# Altium PCB PATHOS_DriveBoard.PcbDoc (part 2 of 2)
Units mm, origin at the board's own origin, x right, y up, seen from the top; angles counter-clockwise.
Board outline 131 x 135 mm, 2 copper layers (Top Layer, Bottom Layer), stack 1.57 mm thick; 68 components, 99 nets, 394 pads, 251 vias.
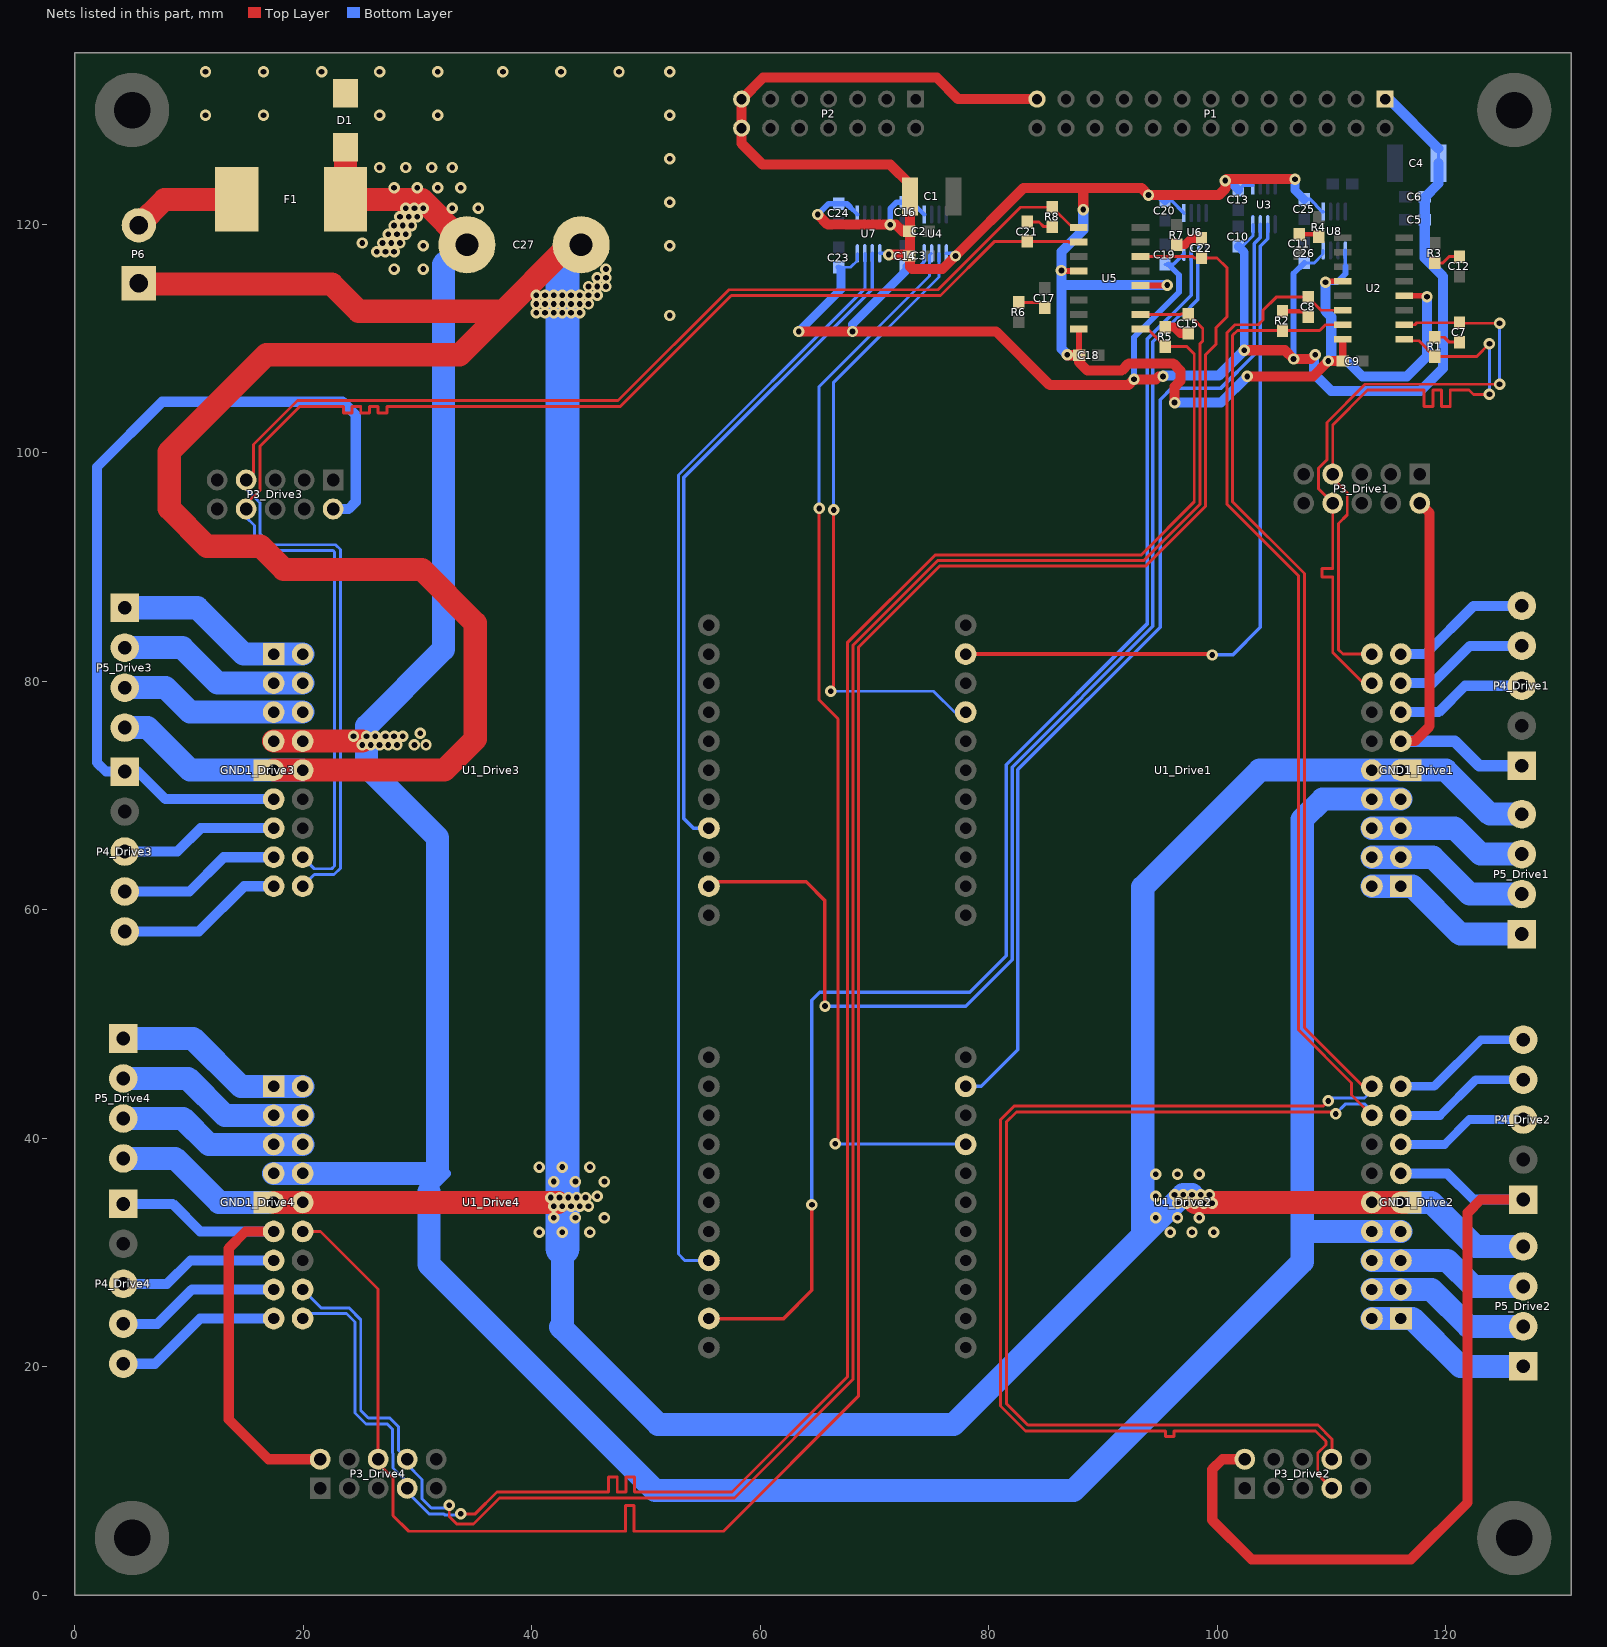
[diagram p2: the nets of this part, all layers, seen from the top]

## Via types
v1: diameter 1, hole 0.5, Top Layer to Bottom Layer, 249 vias
v2: diameter 1.27, hole 0.5, Top Layer to Bottom Layer, 2 vias

## Nets (pads, with @x,y where several pads share a name; then routed paths per layer and width w, separated by ;. In a path a pad name is that pad's centre, name@x,y a point inside that pad or via, vN(x,y) a via of type N, cw(c..) or ccw(c..) an arc to the next point about the centre after c; other vN are vias at no path point) (continued)
ENC_A_DIFF_P4: C22.2 P3_Drive4.6 U1_Drive4.12 U5.6 | length 210.5
  Top Layer w0.254: U1_Drive4.12@19.939,31.83 21.51,31.83 26.543,26.797 P3_Drive4.6@26.543,11.891 26.543,11.557 27.853,10.247 27.853,6.949 29.214,5.588 41.199,5.588 48.184,5.588 48.184,7.853 48.946,7.853 48.946,5.588 49.708,5.588 50.089,5.588 56.769,5.588 68.58,17.399 68.58,82.963 75.711,90.094 93.745,90.094 98.955,95.304 98.955,108.564 99.873,109.481 99.873,110.922 100.838,111.887 100.838,116.205 99.982,117.062 C22.2@98.618,117.062 97.991,117.062 97.879,117.174 U5.6@93.284,117.174
ENC_B_DIFF_N1: P3_Drive1.7 R1.1 U1_Drive1.18 U2.1 | length 57.6
  Top Layer w0.254: U1_Drive1.18@113.538,82.376 110.998,82.376 110.617,82.757 110.617,93.806 111.379,94.568 111.379,96.473 110.109,97.743 P3_Drive1.7@110.109,98.124 110.109,102.442 113.157,105.49 115.697,105.49 118.11,105.49 118.11,104.041 118.872,104.041 118.872,105.49 119.634,105.49 119.634,104.041 120.396,104.041 120.396,105.49 120.777,105.49 122.047,105.49 122.428,105.109 v1(123.825,105.109) ; U2.1@116.379,109.935 116.506,109.808 117.649,109.808 R1.1@119.046,108.411 122.682,108.411 v1(123.825,109.554)
  Bottom Layer w0.254: v1(123.825,105.109) 123.825,109.3 123.952,109.427 v1(123.825,109.554)
ENC_B_DIFF_N2: P3_Drive2.7 R2.1 U1_Drive2.18 U2.15 | length 176.5
  Top Layer w0.254: v1(109.728,43.26) 109.267,42.799 82.213,42.799 81.026,41.612 81.026,16.554 83.207,14.373 86.766,14.373 95.453,14.373 95.453,13.865 96.215,13.865 96.215,14.373 96.596,14.373 108.607,14.373 109.521,13.459 109.521,13.148 108.799,12.426 108.799,10.581 P3_Drive2.7@110.029,9.351 ; U2.15@110.979,111.205 109.474,111.205 108.966,110.697 R2.1@105.711,110.697 101.763,110.697 101.346,110.28 101.346,95.714 107.637,89.423 107.637,49.669 112.776,44.53 U1_Drive2.18@113.538,44.53 U1_Drive2.18@113.919,44.53
  Bottom Layer w0.254: v1(109.728,43.26) 109.982,43.514 112.903,43.514 U1_Drive2.18@113.919,44.53
ENC_B_DIFF_N3: P3_Drive3.7 R8.1 U1_Drive3.18 U5.9 | length 129.7
  Top Layer w0.254: P3_Drive3.7@14.986,97.616 15.621,98.251 15.621,100.711 19.482,104.572 47.549,104.572 57.25,114.273 75.565,114.273 82.784,121.492 R8.1@85.537,121.492 87.188,119.841 87.757,119.841 U5.9@87.884,119.714
  Bottom Layer w0.254: P3_Drive3.7@14.986,97.616 14.986,96.841 16.216,95.611 16.216,92.877 17.145,91.948 22.816,91.948 23.241,91.523 23.241,63.624 22.689,63.072 20.955,63.072 U1_Drive3.18@19.939,62.056
ENC_B_DIFF_N4: P3_Drive4.7 R5.1 U1_Drive4.18 U5.1 | length 191.1
  Top Layer w0.254: v1(33.782,7.112) 35.052,7.112 36.957,9.017 44.755,9.017 46.711,9.017 46.711,10.333 47.473,10.333 47.473,9.017 48.235,9.017 48.235,10.333 48.997,10.333 48.997,9.017 49.759,9.017 50.14,9.017 57.531,9.017 67.615,19.101 67.615,83.363 75.311,91.059 93.345,91.059 97.99,95.704 97.99,108.639 97.329,109.3 R5.1@95.443,109.3 94.046,110.697 93.411,110.697 U5.1@93.284,110.824
  Bottom Layer w0.254: U1_Drive4.18@20.146,24.21 U1_Drive4.18@19.939,24.21 20.367,24.638 23.771,24.638 24.511,23.898 24.511,15.948 25.473,14.986 27.349,14.986 27.813,14.522 27.813,12.443 27.853,12.403 27.853,11.136 29.083,9.906 P3_Drive4.7@29.083,9.351 29.083,9.017 30.988,7.112 32.282,7.112 32.401,6.993 33.647,6.993 33.766,7.112 v1(33.782,7.112)
ENC_B_DIFF_P1: C7.2 P3_Drive1.8 U1_Drive1.16 U2.2 | length 57.6
  Top Layer w0.254: U1_Drive1.16@113.538,79.836 112.776,79.836 110.109,82.503 110.109,88.091 110.109,89.107 109.167,89.107 109.167,89.869 110.109,89.869 110.109,90.631 110.109,91.012 P3_Drive1.8@110.109,95.584 108.879,96.814 108.879,98.659 109.599,99.379 109.601,99.379 109.601,102.652 112.947,105.998 v1(124.714,105.998) ; U2.2@116.379,111.205 117.281,111.205 117.457,111.381 C7.2@121.205,111.381 121.254,111.332 v1(124.714,111.332)
  Bottom Layer w0.254: v1(124.714,105.998) v1(124.714,111.332)
ENC_B_DIFF_P2: C8.1 P3_Drive2.8 U1_Drive2.16 U2.14 | length 176.4
  Top Layer w0.254: P3_Drive2.8@110.363,12.225 P3_Drive2.8@110.029,11.891 110.029,13.669 108.817,14.881 83.417,14.881 81.534,16.764 81.534,41.402 82.423,42.291 110.189,42.291 v1(110.363,42.117) ; U2.14@110.979,112.475 109.093,112.475 C8.1@107.95,113.618 105.156,113.618 104.013,112.475 104.013,111.633 103.585,111.205 101.553,111.205 100.838,110.49 100.838,95.504 107.129,89.213 107.129,49.458 111.76,44.828 111.76,43.768 U1_Drive2.16@113.538,41.99
  Bottom Layer w0.254: v1(110.363,42.117) 111.252,43.006 112.903,43.006 U1_Drive2.16@113.919,41.99
ENC_B_DIFF_P3: C21.1 P3_Drive3.8 U1_Drive3.16 U5.10 | length 129.7
  Top Layer w0.254: P3_Drive3.8@14.986,95.076 14.986,95.504 16.216,96.734 16.216,100.588 19.692,104.064 22.352,104.064 22.733,104.064 23.495,104.064 23.495,103.494 24.257,103.494 24.257,104.064 25.019,104.064 25.019,103.494 25.781,103.494 25.781,104.064 26.543,104.064 26.543,103.494 27.305,103.494 27.305,104.064 29.845,104.064 47.759,104.064 57.46,113.765 75.775,113.765 80.518,118.508 C21.1@83.378,118.508 86.919,118.508 86.982,118.444 U5.10@87.884,118.444
  Bottom Layer w0.254: P3_Drive3.8@14.986,95.076 14.986,94.361 15.708,93.639 15.708,92.666 16.935,91.44 22.606,91.44 22.733,91.313 22.733,63.834 22.479,63.58 20.955,63.58 U1_Drive3.16@19.939,64.596
ENC_B_DIFF_P4: C15.2 P3_Drive4.8 U1_Drive4.16 U5.2 | length 191.1
  Top Layer w0.254: v1(32.766,7.874) 32.766,6.882 33.417,6.231 34.889,6.231 37.167,8.509 57.741,8.509 68.123,18.89 68.123,83.152 75.521,90.551 93.555,90.551 98.498,95.494 98.498,109.547 98.73,109.779 98.73,110.888 C15.2@97.475,112.143 96.848,112.143 96.799,112.094 U5.2@93.284,112.094
  Bottom Layer w0.254: U1_Drive4.16@19.939,26.75 21.543,25.146 23.981,25.146 25.019,24.108 25.019,16.158 25.683,15.494 27.559,15.494 28.321,14.732 28.321,12.653 P3_Drive4.8@29.083,11.891 29.083,11.43 30.393,10.12 30.393,8.426 31.198,7.62 32.512,7.62 v1(32.766,7.874)
HALL_1_Drive1: P4_Drive1.3 U1_Drive1.13 | length 11.5
  Bottom Layer w0.889: U1_Drive1.13@116.078,77.296 119.38,77.296 121.681,79.597 P4_Drive1.3@126.666,79.597
HALL_1_Drive2: P4_Drive2.3 U1_Drive2.13 | length 11.6
  Bottom Layer w0.762: U1_Drive2.13@116.078,39.45 119.888,39.45 122.062,41.624 P4_Drive2.3@126.793,41.624
HALL_1_Drive3: P4_Drive3.3 U1_Drive3.13 | length 13.9
  Bottom Layer w0.889: P4_Drive3.3@4.365,65.089 8.955,65.089 11.002,67.136 U1_Drive3.13@17.399,67.136
HALL_1_Drive4: P4_Drive4.3 U1_Drive4.13 | length 14
  Bottom Layer w0.889: P4_Drive4.3@4.238,27.243 8.066,27.243 10.113,29.29 U1_Drive4.13@17.399,29.29
HALL_2_Drive1: P4_Drive1.4 U1_Drive1.15 | length 11.9
  Bottom Layer w0.889: U1_Drive1.15@116.078,79.836 118.872,79.836 122.133,83.097 P4_Drive1.4@126.666,83.097
HALL_2_Drive2: P4_Drive2.4 U1_Drive2.15 | length 12
  Bottom Layer w0.762: U1_Drive2.15@116.078,41.99 119.507,41.99 122.641,45.124 P4_Drive2.4@126.793,45.124
HALL_2_Drive3: P4_Drive3.4 U1_Drive3.15 | length 14.3
  Bottom Layer w0.889: P4_Drive3.4@4.365,61.589 10.027,61.589 13.034,64.596 U1_Drive3.15@17.399,64.596
HALL_2_Drive4: P4_Drive4.4 U1_Drive4.15 | length 14.4
  Bottom Layer w0.889: P4_Drive4.4@4.238,23.743 7.233,23.743 10.24,26.75 U1_Drive4.15@17.399,26.75
HALL_3_Drive1: P4_Drive1.5 U1_Drive1.17 | length 12.3
  Bottom Layer w0.889: U1_Drive1.17@116.078,82.376 118.237,82.376 122.458,86.597 P4_Drive1.5@126.666,86.597
HALL_3_Drive2: P4_Drive2.5 U1_Drive2.17 | length 12
  Bottom Layer w0.762: U1_Drive2.17@116.459,44.53 118.999,44.53 123.093,48.624 P4_Drive2.5@126.793,48.624
HALL_3_Drive3: P4_Drive3.5 U1_Drive3.17 | length 14.7
  Bottom Layer w0.889: P4_Drive3.5@4.365,58.089 10.845,58.089 14.812,62.056 U1_Drive3.17@17.399,62.056
HALL_3_Drive4: P4_Drive4.5 U1_Drive4.17 | length 14.8
  Bottom Layer w0.889: P4_Drive4.5@4.238,20.243 7.007,20.243 10.974,24.21 U1_Drive4.17@17.399,24.21
NetC7_1: C7.1 R1.2 | length 2.3
  Top Layer w0.254: R1.2@119.046,110.111 119.875,110.111 120.305,109.681 C7.1@121.205,109.681
NetC8_2: C8.2 R2.2 | length 2.4
  Top Layer w0.381: R2.2@105.711,112.397 107.471,112.397 C8.2@107.95,111.918
NetC11_2: C11.2 R4.2 | length 1.8
  Top Layer w0.381: C11.2@107.188,119.128 108.661,119.128 R4.2@108.886,118.903
NetC12_1: C12.1 R3.2 | length 2.4
  Top Layer w0.254: R3.2@119.046,116.617 119.748,116.617 120.305,117.174 C12.1@121.205,117.174
NetC15_1: C15.1 R5.2 | length 2.3
  Top Layer w0.762: R5.2@95.443,111 96.192,111 96.749,110.443 C15.1@97.475,110.443
NetC17_2: C17.2 R6.2 | length 2.5
  Top Layer w0.254: R6.2@82.616,113.159 84.423,113.159 C17.2@84.902,112.68
NetC21_2: C21.2 R8.2 | length 2.3
  Top Layer w0.254: C21.2@83.378,120.208 84.39,120.208 84.805,119.792 R8.2@85.537,119.792
NetC22_1: C22.1 R7.2 | length 2.4
  Top Layer w0.762: R7.2@96.459,118.205 97.178,118.205 97.735,118.762 C22.1@98.618,118.762
NetF1_1: F1.1 P6.2 | length 9.5
  Top Layer w2: P6.2@5.588,119.913 7.849,122.174 F1.1@14.168,122.174
PWM1: U1_Drive1.22 U4.6 | length 54.8
  Top Layer w0.254: v1(66.167,79.121) 66.421,79.375 v1(66.421,94.996)
  Bottom Layer w0.254: v1(66.167,79.121) 75.161,79.121 76.986,77.296 U1_Drive1.22@77.978,77.296 ; v1(66.421,94.996) 66.421,106.172 75.642,115.393 U4.6@75.642,117.457
PWM2: U1_Drive2.22 U4.7 | length 94.3
  Top Layer w0.254: v1(65.151,95.123) 65.151,78.359 66.802,76.708 66.802,39.624 66.675,39.497 v1(66.548,39.497)
  Bottom Layer w0.254: v1(65.151,95.123) 65.151,105.812 74.822,115.483 74.822,117.287 U4.7@74.992,117.457 ; v1(66.548,39.497) 77.931,39.497 U1_Drive2.22@77.978,39.45
PWM3: U1_Drive3.22 U7.6 | length 58.8
  Bottom Layer w0.305: U1_Drive3.22@55.499,67.136 54.149,67.136 53.315,67.97 53.315,97.844 69.8,114.33 U7.6@69.8,117.457
PWM4: U1_Drive4.22 U7.7 | length 97.3
  Bottom Layer w0.254: U1_Drive4.22@55.499,29.29 53.387,29.29 52.832,29.845 52.832,98.044 69.15,114.362 U7.7@69.15,117.457
PWR_GND: C27.2 D1.A GND1_Drive1.1 GND1_Drive2.1 GND1_Drive3.1 GND1_Drive4.1 P5_Drive1.4 P5_Drive2.4 P5_Drive3.4 P5_Drive4.4 P6.1 U1_Drive1.9 U1_Drive1.10 U1_Drive2.9 U1_Drive2.10 U1_Drive3.9 U1_Drive3.10 U1_Drive4.9 U1_Drive4.10 | length 462.8
  Top Layer w2.032: P6.1@5.588,114.761 22.479,114.761 24.845,112.395 37.479,112.395 ; U1_Drive4.9@17.399,34.37 U1_Drive4.10@19.939,34.37 v1@42.291,34.37 ; U1_Drive3.9@17.399,72.216 U1_Drive3.10@19.939,72.216 32.338,72.216 35.052,74.93 35.052,85.09 30.353,89.789 18.288,89.789 16.256,91.821 11.557,91.821 8.255,95.123 8.255,100.076 16.764,108.585 33.669,108.585 37.479,112.395 ; C27.2@42.639,117.555 37.479,112.395 ; v1@98.044,34.37 U1_Drive2.9@116.459,34.37
  Bottom Layer w2.032: P5_Drive4.4@4.238,38.221 8.769,38.221 12.62,34.37 U1_Drive4.9@17.399,34.37 U1_Drive4.10@19.939,34.37 ; P5_Drive3.4@4.365,75.94 6.356,75.94 10.08,72.216 U1_Drive3.9@17.399,72.216 U1_Drive3.10@19.939,72.216 ; 42.522,23.472 51.054,14.939 76.915,14.939 v1(97.028,35.052) v1(97.79,35.052) ; 42.672,23.321 42.672,30.353 ; C27.2@42.672,116.531 C27.2@43.764,117.624 ; 93.472,31.957 93.472,61.976 103.712,72.216 U1_Drive1.10@113.538,72.216 U1_Drive1.9@116.078,72.216 120.015,72.216 123.866,68.365 P5_Drive1.4@126.666,68.365 ; U1_Drive2.10@113.538,34.37 118.745,34.37 122.596,30.519 P5_Drive2.4@126.793,30.519
  Bottom Layer w3: 42.672,30.353 C27.2@42.672,116.531
  other v1: 40.64,31.75 42.672,31.75 45.085,31.75 95.885,31.75 97.79,31.75 99.695,31.75 41.91,33.02 43.815,33.02 46.355,33.02 94.615,33.02 96.52,33.02 98.425,33.02 41.91,34.036 42.672,34.036 43.434,34.036 44.196,34.036 44.958,34.036 96.52,34.29 97.282,34.29 98.044,34.29 98.806,34.29 99.568,34.29 41.656,34.798 42.418,34.798 43.18,34.798 43.942,34.798 44.704,34.798 45.72,34.925 94.615,34.925 96.266,35.052 98.552,35.052 99.314,35.052 41.91,36.195 43.815,36.195 46.355,36.195 94.615,36.83 96.52,36.83 98.425,36.83 40.64,37.465 42.672,37.465 45.085,37.465 52.07,112.014 40.386,112.268 41.148,112.268 41.91,112.268 42.672,112.268 43.434,112.268 44.196,112.268 40.386,113.03 41.148,113.03 41.91,113.03 42.672,113.03 43.434,113.03 44.196,113.03 44.958,113.03 40.386,113.792 41.148,113.792 41.91,113.792 42.672,113.792 43.434,113.792 44.196,113.792 44.958,113.792 45.72,113.792 44.958,114.554 45.72,114.554 46.482,114.554 45.72,115.316 46.482,115.316 46.482,116.078 52.07,118.11 52.07,121.92 52.07,125.73 11.43,129.54 16.51,129.54 26.67,129.54 31.75,129.54 52.07,129.54 11.43,133.35 16.51,133.35 21.59,133.35 26.67,133.35 31.75,133.35 37.465,133.35 42.545,133.35 47.625,133.35 52.07,133.35
READY_DRV1: U1_Drive1.20 U3.6 | length 62.3
  Top Layer w0.381: U1_Drive1.20@77.978,82.376 v1@99.568,82.376
  Bottom Layer w0.305: v1(99.568,82.296) 101.342,82.296 103.759,84.713 103.759,118.063 104.424,118.728 U3.6@104.424,119.997
READY_DRV2: U1_Drive2.20 U3.7 | length 89.1
  Bottom Layer w0.305: U1_Drive2.20@78.359,44.53 79.328,44.53 82.55,47.752 82.55,72.267 94.996,84.713 94.996,104.648 96.012,105.664 100.33,105.664 103.251,108.585 103.251,118.317 103.774,118.84 U3.7@103.774,119.997
READY_DRV3: U1_Drive3.20 U6.6 | length 107
  Top Layer w0.305: U1_Drive3.20@55.499,62.437 64.008,62.437 65.659,60.786 v1(65.659,51.562)
  Bottom Layer w0.305: v1(65.659,51.562) 77.978,51.562 82.042,55.626 82.042,72.477 94.361,84.796 94.361,109.71 96.745,112.094 96.967,112.094 98.284,113.411 98.284,117.493 U6.6@98.375,117.584
READY_DRV4: U1_Drive4.20 U6.7 | length 122.4
  Top Layer w0.305: U1_Drive4.20@55.499,24.21 62.056,24.21 64.516,26.67 v1(64.516,34.163)
  Bottom Layer w0.305: v1(64.516,34.163) 64.516,52.07 65.202,52.756 78.334,52.756 81.534,55.956 81.534,72.688 93.853,85.007 93.853,109.92 97.725,113.792 U6.7@97.725,117.584
V3.3: C1.2 C2.2 C3.2 C9.2 C13.2 C16.2 C18.2 C20.2 C24.2 C25.2 P1.25 P2.13 P2.14 U2.4 U2.12 U2.16 U3.1 U4.1 U4.5 U5.4 U5.12 U5.16 U6.1 U7.1 U7.5 U8.1 U8.5 | length 221.8
  Top Layer w0.305: C3.2@72.924,117.348 73.025,117.247 C3.2@73.046,117.226
  Top Layer w0.381: U5.16@87.884,110.824 U5.16@87.901,110.807 ; U2.16@110.979,109.935 U2.16@110.996,109.918
  Top Layer w0.508: v1@86.36,115.904 U5.12@87.884,115.904 ; C18.2@87.901,108.538 U5.16@87.901,110.807 ; U5.4@93.284,114.634 v1@95.584,114.634 ; v1(109.474,114.935) 109.554,115.015 U2.12@110.979,115.015 ; U2.4@116.379,113.745 118.284,113.745 v1(118.364,113.665)
  Top Layer w0.635: C9.2@110.996,108.03 U2.16@110.996,109.918
  Top Layer w0.762: 72.465,119.385 73.025,119.385 C3.2@73.025,117.247 ; C3.2@73.046,117.226 73.046,116.311 73.1,116.257 ; v1@95.584,114.634 v1(95.631,114.681)
  Top Layer w0.889: v1(65.024,120.857) 65.913,119.968 v1(71.374,119.968) 71.882,119.968 72.465,119.385 ; v1(71.247,117.348) C3.2@72.924,117.348 ; P1.25@84.22,130.953 77.327,130.953 75.438,132.842 60.249,132.842 P2.13@58.36,130.953 P2.14@58.36,128.413 58.36,127.06 60.198,125.222 71.374,125.222 73.1,123.496 C1.2@73.1,122.433 73.1,116.257 73.279,116.078 75.946,116.078 v1(77.089,117.221) 83.058,123.19 93.345,123.19 v1(93.98,122.555) 100.144,122.555 100.711,123.122 v1(100.711,123.825) 100.838,123.952 v1(106.807,123.952) ; v1@86.868,108.538 C18.2@87.901,108.538 87.901,107.933 88.646,107.188 91.631,107.188 92.266,107.823 94.77,107.823 94.775,107.828 95.725,107.828 95.73,107.823 96.139,107.823 96.774,107.188 96.774,106.299 96.266,105.791 v1(96.266,104.394) ; v1(88.265,121.285) 88.265,123.19 ; v1(102.616,106.68) 108.378,106.68 v1(109.728,108.03) C9.2@110.996,108.03
  Bottom Layer w0.305: U7.5@70.45,117.457 v1@71.138,117.457 ; U4.5@76.292,117.457 76.853,117.457 v1(77.089,117.221) ; C20.2@95.424,122.049 96.01,122.049 U6.1@97.075,120.984 ; C13.2@101.854,122.985 102.266,123.397 U3.1@103.124,123.397 ; C25.2@107.616,122.176 108.133,122.176 109.198,121.111 U8.1@109.267,121.111 ; 111.217,116.332 U8.5@111.217,117.711
  Bottom Layer w0.381: 67.865,121.492 U7.1@68.5,120.857 ; v1@71.138,117.457 v1(71.247,117.348) ; C16.2@72.691,121.922 73.277,121.922 U4.1@74.342,120.857
  Bottom Layer w0.508: v1(65.024,120.857) 65.962,121.795 C24.2@66.849,121.795 67.562,121.795 67.865,121.492 ; v1(71.374,119.968) 71.374,121.365 71.931,121.922 C16.2@72.691,121.922 ; v1(109.474,114.935) 110.49,114.935 111.217,115.662 111.217,116.332
  Bottom Layer w0.762: v1(93.98,122.555) 94.918,122.555 C20.2@95.424,122.049 ; v1(100.711,123.825) 101.014,123.825 C13.2@101.854,122.985 ; v1(106.807,123.952) 106.807,122.985 C25.2@107.616,122.176
  Bottom Layer w0.889: v1(86.868,108.585) 86.36,109.093 86.36,114.681 ; v1(88.265,121.285) 88.265,119.507 86.36,117.602 v1(86.36,115.951) 86.36,114.681 ; v1(95.631,114.681) 86.36,114.681 ; v1(96.266,104.394) 100.33,104.394 v1(102.616,106.68) ; v1(109.474,114.935) 109.474,112.395 109.982,111.887 109.982,108.284 v1(109.728,108.03) 111.368,108.03 112.718,106.68 116.586,106.68 118.364,108.458 v1(118.364,113.665)
V5.0: C4.2 C5.2 C6.2 C10.2 C14.2 C19.2 C23.2 C26.2 P1.1 U3.8 U4.8 U6.8 U7.8 U8.8 | length 147.5
  Top Layer w0.508: v1@94.869,106.68 v1(95.25,106.68)
  Top Layer w0.889: v1(63.373,110.617) v1(68.072,110.617) 80.645,110.617 85.344,105.918 92.202,105.918 v1(92.71,106.426) 94.615,106.426 v1@94.869,106.68 ; v1(102.362,108.966) 105.918,108.966 v1(106.68,108.204) 108.204,108.204 v1(108.585,108.585)
  Bottom Layer w0.254: C23.2@66.849,116.236 67.896,116.236 68.5,116.84 U7.8@68.5,117.457 ; C14.2@72.691,116.363 73.992,116.363 74.342,116.713 U4.8@74.342,117.457 ; C19.2@95.424,116.49 C19.2@95.727,116.49 ; U6.8@97.075,117.395 U6.8@97.075,117.584 ; C10.2@101.854,118.061 102.186,118.061 103.124,118.999 U3.8@103.124,119.997 ; C26.2@107.616,116.617 108.489,116.617 109.267,117.395 U8.8@109.267,117.711 ; P1.1@114.7,130.953 P1.1@115.046,130.953 ; C4.2@119.375,125.349 C4.2@119.375,126.624
  Bottom Layer w0.305: C19.2@95.727,116.49 96.17,116.49 U6.8@97.075,117.395
  Bottom Layer w0.508: C23.2@66.849,116.236 C23.2@67.056,116.029 ; C14.2@72.691,115.871 C14.2@72.691,116.363 ; v1(92.71,106.426) 92.71,110.109 96.647,114.046 96.647,115.57 C19.2@95.727,116.49 ; v1(95.25,106.68) v1@95.318,106.748 ; v1(106.68,108.204) 106.68,115.681 C26.2@107.616,116.617
  Bottom Layer w0.762: v1(63.373,110.617) 67.056,114.3 C23.2@67.056,116.029 ; v1(68.072,110.617) 68.072,111.252 C14.2@72.691,115.871 ; C10.2@101.854,118.061 102.362,117.553 v1(102.362,108.966)
  Bottom Layer w0.889: v1@95.318,106.748 100.144,106.748 v1(102.362,108.966) ; v1(108.585,108.585) 108.458,108.458 108.458,106.934 109.982,105.41 117.776,105.41 119.761,107.395 119.761,115.443 118.159,117.045 C5.2@118.159,120.396 118.159,122.35 119.375,123.566 C4.2@119.375,125.349 ; P1.1@115.046,130.953 C4.2@119.375,126.624
V5.0_ENC_Drive1: P3_Drive1.2 P4_Drive1.1 U1_Drive1.11 | length 34.4
  Top Layer w0.889: U1_Drive1.11@116.078,74.756 117.285,74.756 118.593,76.064 118.593,94.72 P3_Drive1.2@117.729,95.584
  Bottom Layer w1.016: U1_Drive1.11@116.078,74.756 120.777,74.756 122.936,72.597 P4_Drive1.1@126.666,72.597
V5.0_ENC_Drive2: P3_Drive2.2 P4_Drive2.1 U1_Drive2.11 | length 75.9
  Top Layer w0.889: P3_Drive2.2@102.409,11.891 100.457,11.891 99.568,11.002 99.568,6.557 102.997,3.128 116.945,3.128 121.92,8.103 121.92,33.481 123.063,34.624 P4_Drive2.1@126.793,34.624
  Bottom Layer w0.889: U1_Drive2.11@116.078,36.91 120.142,36.91 122.428,34.624 P4_Drive2.1@126.793,34.624
V5.0_ENC_Drive3: P3_Drive3.2 P4_Drive3.1 U1_Drive3.11 | length 78
  Bottom Layer w0.762: P4_Drive3.1@4.365,72.089 P4_Drive3.1@5.508,72.089
  Bottom Layer w0.889: P4_Drive3.1@4.365,72.089 2.714,72.089 1.93,72.873 1.93,98.755 7.633,104.458 23.432,104.458 24.587,103.302 24.587,95.707 23.956,95.076 P3_Drive3.2@22.606,95.076 ; P4_Drive3.1@5.508,72.089 7.921,69.676 U1_Drive3.11@17.399,69.676
V5.0_ENC_Drive4: P3_Drive4.2 P4_Drive4.1 U1_Drive4.11 | length 43.1
  Top Layer w0.889: U1_Drive4.11@17.399,31.83 14.939,31.83 13.462,30.353 13.462,15.367 16.938,11.891 P3_Drive4.2@21.463,11.891
  Bottom Layer w0.889: P4_Drive4.1@4.238,34.243 8.556,34.243 10.969,31.83 U1_Drive4.11@17.399,31.83
VCC_PWR: C27.1 D1.K F1.2 U1_Drive1.7 U1_Drive1.8 U1_Drive2.7 U1_Drive2.8 U1_Drive3.7 U1_Drive3.8 U1_Drive4.7 U1_Drive4.8 | length 283.2
  Top Layer w2.032: U1_Drive3.7@17.399,74.756 U1_Drive3.8@19.939,74.756 v1@25.146,74.756 ; D1.K@23.673,126.758 23.678,126.753 F1.2@23.678,122.174 30.353,122.174 C27.1@34.315,118.212
  Bottom Layer w0.762: 30.988,35.339 32.559,36.91 ; C27.1@32.483,116.709 32.483,117.399 C27.1@32.639,117.555
  Bottom Layer w2.032: U1_Drive4.7@17.399,36.91 U1_Drive4.8@19.939,36.91 31.449,36.91 31.75,37.211 31.75,66.294 25.527,72.517 v1(25.527,75.184) 25.527,76.073 32.258,82.804 32.258,116.484 C27.1@32.483,116.709 ; 30.988,35.339 30.988,28.956 50.8,9.144 87.409,9.144 107.442,29.177 107.442,67.898 109.22,69.676 U1_Drive1.8@113.538,69.676 U1_Drive1.7@116.078,69.676 ; 107.442,31.83 U1_Drive2.7@116.078,31.83
  other v1: 25.146,74.422 25.908,74.422 26.67,74.422 27.432,74.422 28.194,74.422 29.718,74.422 30.734,74.422 24.384,75.184 26.289,75.184 27.178,75.184 27.94,75.184 28.702,75.184 30.226,75.438 27.94,116.078 30.48,116.078 26.416,117.602 27.178,117.602 27.94,117.602 30.48,118.11 25.146,118.364 26.924,118.364 27.686,118.364 28.448,118.364 27.432,119.126 28.194,119.126 28.956,119.126 27.94,119.888 28.702,119.888 29.464,119.888 28.448,120.65 29.21,120.65 29.972,120.65 28.956,121.412 29.718,121.412 30.48,121.412 33.02,121.412 35.306,121.412 27.94,123.19 29.972,123.19 31.75,123.19 33.782,123.19 26.67,124.968 28.956,124.968 31.242,124.968 33.02,124.968
WINDING_1_Drive1: P5_Drive1.1 U1_Drive1.1 U1_Drive1.2 | length 14.9
  Bottom Layer w2.032: U1_Drive1.2@113.538,62.056 U1_Drive1.1@116.078,62.056 117.094,62.056 121.285,57.865 P5_Drive1.1@126.666,57.865
WINDING_1_Drive2: P5_Drive2.1 U1_Drive2.1 U1_Drive2.2 | length 15
  Bottom Layer w2.032: U1_Drive2.2@113.538,24.21 116.459,24.21 117.094,24.21 121.285,20.019 P5_Drive2.1@126.793,20.019
WINDING_1_Drive3: P5_Drive3.1 U1_Drive3.1 U1_Drive3.2 | length 17.3
  Bottom Layer w2.032: P5_Drive3.1@4.365,86.44 10.715,86.44 14.779,82.376 U1_Drive3.1@17.399,82.376 U1_Drive3.2@19.939,82.376
WINDING_1_Drive4: P5_Drive4.1 U1_Drive4.1 U1_Drive4.2 | length 17.4
  Bottom Layer w2.032: P5_Drive4.1@4.238,48.721 10.334,48.721 14.525,44.53 U1_Drive4.1@17.399,44.53 U1_Drive4.2@19.939,44.53
WINDING_2_Drive1: P5_Drive1.2 U1_Drive1.3 U1_Drive1.4 | length 14.5
  Bottom Layer w2.032: U1_Drive1.4@113.538,64.596 U1_Drive1.3@116.078,64.596 118.872,64.596 122.103,61.365 P5_Drive1.2@126.666,61.365
WINDING_2_Drive2: P5_Drive2.2 U1_Drive2.3 U1_Drive2.4 | length 14.6
  Bottom Layer w2.032: U1_Drive2.4@113.538,26.75 U1_Drive2.3@116.078,26.75 118.745,26.75 121.976,23.519 P5_Drive2.2@126.793,23.519
WINDING_2_Drive3: P5_Drive3.2 U1_Drive3.3 U1_Drive3.4 | length 16.9
  Bottom Layer w2.032: P5_Drive3.2@4.365,82.94 9.389,82.94 12.493,79.836 U1_Drive3.3@17.399,79.836 U1_Drive3.4@19.939,79.836
WINDING_2_Drive4: P5_Drive4.2 U1_Drive4.3 U1_Drive4.4 | length 17
  Bottom Layer w2.032: P5_Drive4.2@4.238,45.221 9.897,45.221 13.128,41.99 U1_Drive4.3@17.399,41.99 U1_Drive4.4@19.939,41.99
WINDING_3_Drive1: P5_Drive1.3 U1_Drive1.5 U1_Drive1.6 | length 14.1
  Bottom Layer w2.032: U1_Drive1.6@113.538,67.136 U1_Drive1.5@116.078,67.136 120.777,67.136 123.048,64.865 P5_Drive1.3@126.666,64.865
WINDING_3_Drive2: P5_Drive2.3 U1_Drive2.5 U1_Drive2.6 | length 14.2
  Bottom Layer w2.032: U1_Drive2.6@113.538,29.29 116.459,29.29 120.142,29.29 122.413,27.019 P5_Drive2.3@126.793,27.019
WINDING_3_Drive3: P5_Drive3.3 U1_Drive3.5 U1_Drive3.6 | length 16.5
  Bottom Layer w2.032: P5_Drive3.3@4.365,79.44 7.936,79.44 10.08,77.296 U1_Drive3.5@17.399,77.296 U1_Drive3.6@19.939,77.296
WINDING_3_Drive4: P5_Drive4.3 U1_Drive4.5 U1_Drive4.6 | length 16.6
  Bottom Layer w2.032: P5_Drive4.3@4.238,41.721 9.46,41.721 11.731,39.45 U1_Drive4.5@17.399,39.45 U1_Drive4.6@19.939,39.45
pads on no net: P3_Drive1.1 P3_Drive1.4 P3_Drive1.9 P3_Drive1.10 P3_Drive2.1 P3_Drive2.4 P3_Drive2.9 P3_Drive2.10 P3_Drive3.1 P3_Drive3.4 P3_Drive3.9 P3_Drive3.10 P3_Drive4.1 P3_Drive4.4 P3_Drive4.9 P3_Drive4.10 U1_Drive1.19 U1_Drive1.24 U1_Drive1.25 U1_Drive1.26 U1_Drive1.27 U1_Drive2.19 U1_Drive2.24 U1_Drive2.25 U1_Drive2.26 U1_Drive2.27 U1_Drive3.19 U1_Drive3.24 U1_Drive3.25 U1_Drive3.26 U1_Drive3.27 U1_Drive4.19 U1_Drive4.24 U1_Drive4.25 U1_Drive4.26 U1_Drive4.27 U8.3 U8.6

## Polygon pours and split planes (outlines as drawn)
DGND on Bottom Layer "BottomDGND" (solid, remove dead copper, pour order 36): 53.797,135 53.797,108.839 49.784,104.826 49.784,25.584 55.118,20.25 78.771,20.25 80.366,21.844 80.366,34.527 84.7,38.862 84.7,70.323 92.61,78.232 107.391,78.232 112.547,83.388 112.547,98.908 117.678,104.038 129.87,104.038 131,104.038 131,105.051 131,135
DGND_ENC_Drive3 on Bottom Layer "TopVccPwrIn" (solid, remove dead copper, pour order 28): 7.036,87.833 5.436,87.833 4.318,88.951 4.318,98.654 9.601,103.937 23.241,103.937 23.952,103.226 24.359,102.819 24.359,94.691 12.04,94.691 11.659,95.072 10.16,93.574 10.16,90.322 10.16,89.357 8.636,87.833
VCC_PWR on Bottom Layer "TopVccPwrDrive12" (solid, remove dead copper, pour order 10): 50.8,0 95.758,0 101.346,5.588 101.346,10.668 112.776,22.098 112.776,29.718 113.792,30.734 113.792,68.072 114.808,69.088 114.808,70.612 114.046,71.374 107.442,71.374 104.14,71.374 101.346,68.58 100.33,67.564 100.33,26.743 84.255,10.668 50.8,10.668
PWR_GND on Bottom Layer "TopPwrGndDrive12" (solid, remove dead copper, pour order 8): 78.486,10.675 84.255,10.675 100.33,26.75 100.33,65.786 105.664,71.12 113.538,71.12 113.538,73.152 113.284,73.406 112.776,73.406 112.268,73.406 109.982,75.692 104.716,80.958 101.405,80.958 92.642,80.958 83.82,72.136 83.82,38.354 77.978,32.512 77.978,31.83 77.978,11.183
PWR_GND on Bottom Layer "TopVccPwrDrive3" (solid, remove dead copper, pour order 6): 38.862,121.158 41.656,123.952 44.704,123.952 50.038,123.952 53.086,120.904 53.086,22.86 55.372,20.574 55.626,20.828 78.486,20.828 78.486,10.16 51.054,10.16 38.862,22.352
VCC_PWR on Bottom Layer "TopVccPwrDrive3" (solid, remove dead copper, pour order 4): 21.793,126.238 33.782,126.238 38.354,121.666 38.862,121.158 38.862,92.964 38.862,22.098 43.307,17.653 49.53,11.43 51.308,9.652 51.308,-0.254 41.148,-0.254 38.1,2.794 37.338,3.556 35.052,5.842 35.052,9.398 34.036,10.414 27.432,17.018 27.432,23.368 27.432,29.21 20.828,35.814 20.828,37.338 23.114,39.624 23.368,39.878 23.368,46.736 23.368,105.105 21.793,105.105 19.279,107.62 19.279,119.177 19.279,123.723
PWR_GND on Bottom Layer "BottomDGND" (solid, remove dead copper, pour order 17): 53.086,120.904 53.086,135 0,135 0,126.213 34.54,126.213 39.228,121.524
DGND on Top Layer "TopDGND" (solid, remove dead copper, pour order 34): 53.467,135.026 53.467,107.061 51.156,104.75 47.473,101.067 47.473,25.298 47.473,24.155 53.315,18.313 80.366,18.313 83.414,21.361 84.887,22.835 84.887,70.307 93.015,78.435 108.153,78.435 110.388,80.67 110.388,104.013 112.395,106.02 131,106.02 131,135.026
DGND_ENC_Drive1 on Top Layer "TopVccPwrIn" (solid, remove dead copper, pour order 32): 118.77,71.272 120.218,71.272 123.698,74.752 123.8,74.854 126.666,74.854 126.92,75.536 126.92,76.128 126.92,76.628 126.666,77.318 123.85,77.318 122.961,78.207 122.961,100.863 121.615,102.21 115.512,102.21 113.556,100.254 112.649,99.347 112.649,98.124 117.729,98.124 118.593,97.26 118.593,76.064 118.593,73.889 117.856,73.152
DGND_ENC_Drive2 on Top Layer "TopVccPwrIn" (solid, remove dead copper, pour order 30): 117.653,35.306 118.288,35.306 121.742,38.76 122.377,39.395 126.971,39.395 127.174,39.036 127.174,37.334 126.971,36.855 124.181,36.855 121.488,34.163 121.488,27.813 121.488,8.28 116.942,3.734 102.311,3.734 99.695,6.35 99.695,11.129 100.457,11.891 101.063,12.497 112.827,12.497 114.706,12.497 116.84,14.63 116.84,33.528
DGND_ENC_Drive3 on Top Layer "TopVccPwrIn" (solid, remove dead copper, pour order 26): 14.808,71.247 11.43,71.247 8.331,68.148 7.62,67.437 4.572,67.437 4.572,69.723 4.547,69.748 6.604,69.748 8.484,71.628 8.484,86.131 6.756,87.859 6.756,88.595 7.061,88.9 7.493,88.9 10.439,85.954 11.455,84.938 11.455,75.413 11.455,74.117 12.344,73.228 12.395,73.177 14.808,73.177
DGND_ENC_Drive4 on Top Layer "TopVccPwrIn" (solid, remove dead copper, pour order 24): 16.764,35.306 10.16,35.306 6.604,31.75 4.318,31.75 4.064,31.496 4.064,29.718 9.398,29.718 10.414,28.702 10.414,11.43 10.922,10.922 15.748,6.096 22.86,6.096 24.638,7.874 24.638,9.398 23.114,9.398 23.114,8.128 22.606,7.62 13.97,16.256 13.97,32.258 15.24,33.528 14.859,33.528
PWR_GND on Top Layer "TopPwrGndDrive2" (solid, remove dead copper, pour order 20): 116.078,34.37 114.634,35.814 114.046,35.814 113.284,35.814 110.49,38.608 95.504,38.608 93.472,36.576 93.472,33.02 95.25,31.242 111.506,31.242 114.046,33.782 116.586,33.782
PWR_GND on Top Layer "TopPwrGndDrive4" (solid, remove dead copper, pour order 16): 17.272,35.306 19.812,35.306 21.844,37.338 22.352,37.846 38.354,37.846 45.466,37.846 46.736,36.576 47.244,36.068 47.244,32.258 45.72,30.734 22.606,30.734 19.812,33.528 17.272,33.528
VCC_PWR on Top Layer "TopVccPwrDrive3" (solid, remove dead copper, pour order 14): 17.399,72.216 29.544,72.216 30.734,73.406 31.242,73.914 31.242,75.438 30.226,76.454 24.384,76.454 21.002,76.454 19.304,74.756 17.399,74.756
PWR_GND on Top Layer "TopPwrGndrive3In" (solid, remove dead copper, pour order 12): 0,126.238 0,135 53.34,135 53.34,110.363 47.943,104.966 20.066,104.966 19.796,104.966 12.446,97.616 12.446,95.076 34.21,95.076 38.1,91.186 38.1,71.12 35.64,68.66 35.56,68.58 20.828,68.58 19.732,69.676 17.399,69.676 17.399,82.376 12.145,87.63 0,87.63
NetF1_1 on Top Layer "TopFuse" (solid, remove dead copper, pour order 19): 0,117.831 14.554,117.831 16.053,119.329 16.053,125.755 14.503,127.305 13.818,127.991 7.874,127.991 7.493,127.991 6.452,126.949 6.172,126.67 0,126.67
VCC_PWR on Top Layer "TopVccPwr" (solid, remove dead copper, pour order 21): 21.793,119.355 21.819,119.38 26.099,115.049 29.909,115.049 34.417,115.049 36.716,115.049 38.811,117.145 38.811,121.234 35.662,124.384 33.782,126.263 32.055,127.991 26.264,127.991 22.555,127.991 21.819,127.254 21.819,125.07

## Keep-outs
Keep-Out Layer:
  the board outline again, w0.254

## Other copper
Top Layer:
  pour cut-out: 16.053,119.329 21.768,119.329 21.819,119.38 21.819,125.07 16.078,125.07 16.053,125.044
  text "PATHOS Drive Board" at 10.414,2.769 h2
  text "V1.0 2015-11" at 10.439,1.067 h2

## Silkscreen, mask and mechanical layers (free items; w line width, h text height)
Mechanical 1:
  the board outline again, w0

## Text inside footprints (layer, text, board x,y; h text height)
U1_Drive1: Top Overlay "Motor" at 110.359,76.127 h1.52 r270; Top Overlay "I/O" at 79.828,74.807 h1.52 r270
U1_Drive2: Top Overlay "Motor" at 110.359,38.281 h1.52 r270; Top Overlay "I/O" at 79.828,36.961 h1.52 r270
U1_Drive3: Top Overlay "Motor" at 23.118,68.305 h1.52 r90; Top Overlay "I/O" at 53.649,69.625 h1.52 r90
U1_Drive4: Top Overlay "Motor" at 23.118,30.459 h1.52 r90; Top Overlay "I/O" at 53.649,31.779 h1.52 r90